# EAGLE board Panelize (EAGLE 8.5.2), part 1 of 2
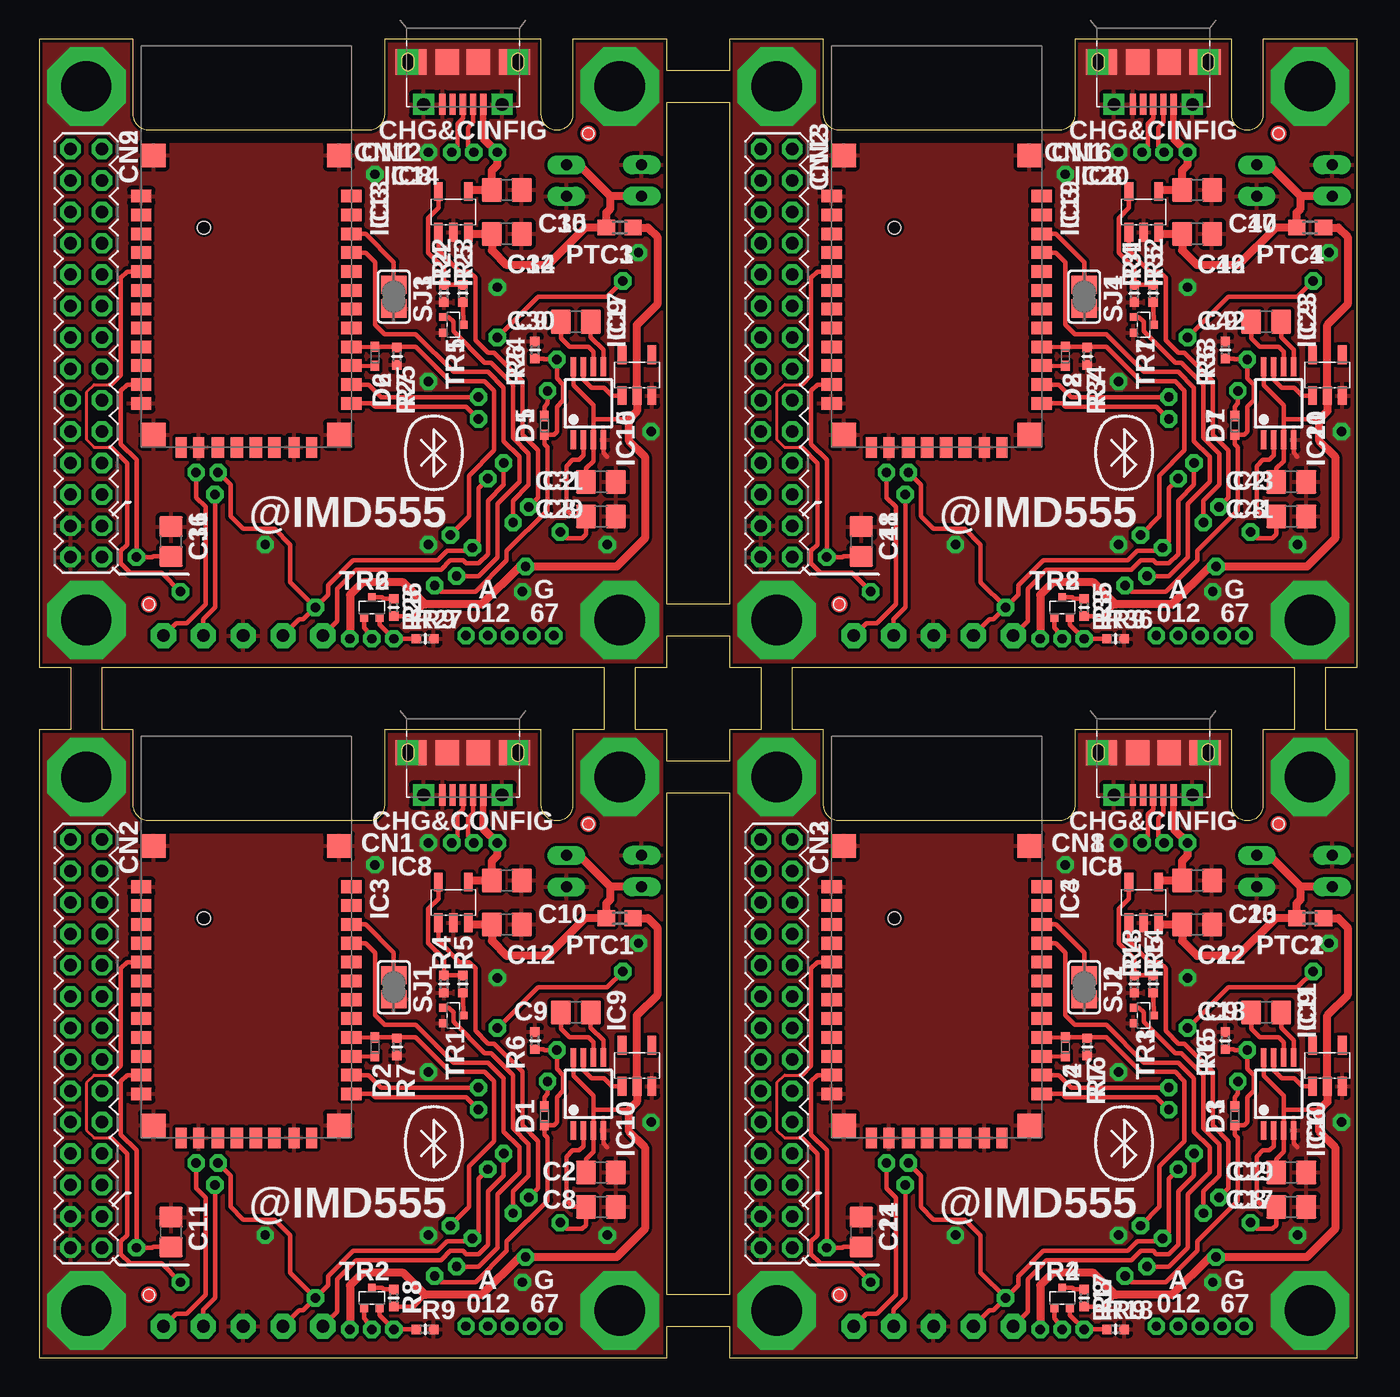
[diagram p0: board, top side]
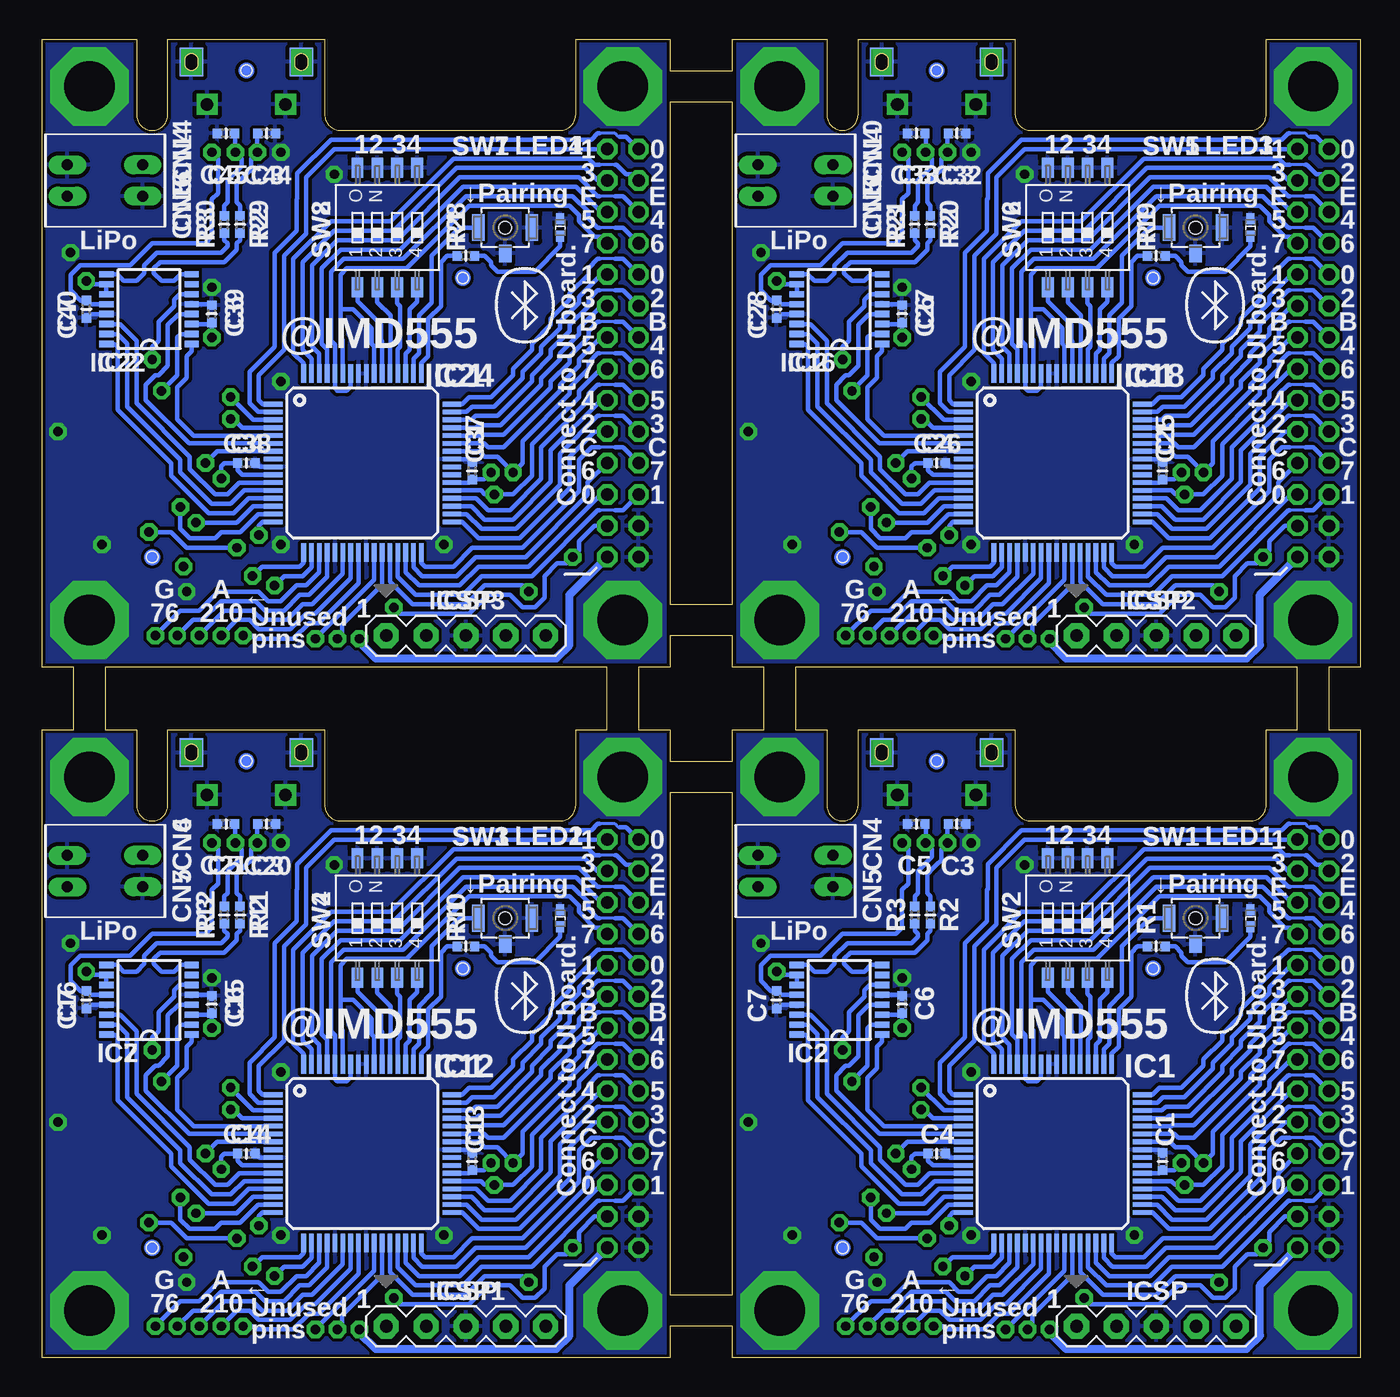
[diagram p1: board, bottom side, seen from below]

Size 84 x 84 mm. Coordinates in mm from the lower left corner, seen from the top.
Outline: 0,0 40,0 40,2 44,2 44,0 84,0 84,40 82,40 82,44 84,44 84,84 78,84 78,79.2 arc-90 77,78.2 arc-90 76,79.2 76,84 66,84 66,79.2 arc-90 65,78.2 51,78.2 arc-90 50,79.2 50,84 44,84 44,82 40,82 40,84 34,84 34,79.2 arc-90 33,78.2 arc-90 32,79.2 32,84 22,84 22,79.2 arc-90 21,78.2 7,78.2 arc-90 6,79.2 6,84 0,84 0,44 2,44 2,40 0,40 0,0
Outline: 40,4 40,36 44,36 44,4 40,4
Outline: 40,38 40,40 38,40 38,44 40,44 40,46 44,46 44,44 46,44 46,40 44,40 44,38 40,38
Outline: 36,40 34,40 34,35.2 arc-90 33,34.2 arc-90 32,35.2 32,40 22,40 22,35.2 arc-90 21,34.2 7,34.2 arc-90 6,35.2 6,40 4,40 4,44 36,44 36,40
Outline: 80,40 78,40 78,35.2 arc-90 77,34.2 arc-90 76,35.2 76,40 66,40 66,35.2 arc-90 65,34.2 51,34.2 arc-90 50,35.2 50,40 48,40 48,44 80,44 80,40
Outline: 40,48 40,80 44,80 44,48 40,48
Copper layers (1*16): Top 0.035mm / dielectric 1.5mm / Bottom 0.035mm
Design rules "SeeedStudio_2layer_DRU_no_angle_20140221_IMD555": minimum track width 0.2mm, minimum drill 0.5mm, track to track 0.2mm, track to pad 0.2mm, pad to pad 0.2mm, via to via 0.2mm, smd to smd 0mil, copper to edge 0.2mm, drill to drill 10mil, minimum pad ring 0.25mm, minimum via ring 0.25mm, stop-mask expansion 0.03mm, vias tented up to drill 5mm, thermal gap 10mil
Net classes: 1 Vbat: clearance 0.4 mm
tRestrict: area 0,39.8 to 84,44.2; area 39.8,0 to 44.2,84
bRestrict: area 0,39.8 to 84,44.2; area 39.8,0 to 44.2,84

## Footprints (pad centres in the part's own frame; a part is rotated, then mirrored left to right if it is on the bottom)
C0402-SS = smd 0.6 x 0.6: 1 -0.55,0; 2 0.55,0
C0805 = smd 1.3 x 1.5: 1 -0.95,0; 2 0.95,0
10118194-0001LF = smd 0.4 x 1.35: P$1 -1.3,4.15; P$2 -0.65,4.15; P$3 0,4.15; P$4 0.65,4.15; P$5 1.3,4.15 | smd 1.5 x 1.8 bottom: P$6 -3.5,1.45; P$7 3.5,1.45 | drill 0.8 pad 1.35 square: S1 -2.5,4.15; S2 2.5,4.15 | drill 0.8 pad 1.3 square: S3 -3.5,1.6; S4 -3.5,1.3; S9 3.5,1.6; S10 3.5,1.3 | smd 2 x 1.6: S5 -3.3,1.45; S8 3.3,1.45 | smd 1.5 x 1.6: S6 -1,1.45; S7 1,1.45
2MM_14X2 = drill 0.8 pad 1.3 octagon: 1 -13,-1; 2 -13,1; 3 -11,-1; 4 -11,1; 5 -9,-1; 6 -9,1; 7 -7,-1; 8 -7,1; 9 -5,-1; 10 -5,1; 11 -3,-1; 12 -3,1; 13 -1,-1; 14 -1,1; 15 1,-1; 16 1,1; 17 3,-1; 18 3,1; 19 5,-1; 20 5,1; 21 7,-1; 22 7,1; 23 9,-1; 24 9,1; 25 11,-1; 26 11,1; 27 13,-1; 28 13,1
PH-2_S = drill 0.7 long: 1 1,0; 2 -1,0
VMN2 = smd 0.65 x 0.55: A 0.6,0; C -0.6,0
TQFP64-10X10 = smd 1.2 x 0.3: 1 -5.7,3.75; 2 -5.7,3.25; 3 -5.7,2.75; 4 -5.7,2.25; 5 -5.7,1.75; 6 -5.7,1.25; 7 -5.7,0.75; 8 -5.7,0.25; 9 -5.7,-0.25; 10 -5.7,-0.75; 11 -5.7,-1.25; 12 -5.7,-1.75; 13 -5.7,-2.25; 14 -5.7,-2.75; 15 -5.7,-3.25; 16 -5.7,-3.75; 33 5.7,-3.75; 34 5.7,-3.25; 35 5.7,-2.75; 36 5.7,-2.25; 37 5.7,-1.75; 38 5.7,-1.25; 39 5.7,-0.75; 40 5.7,-0.25; 41 5.7,0.25; 42 5.7,0.75; 43 5.7,1.25; 44 5.7,1.75; 45 5.7,2.25; 46 5.7,2.75; 47 5.7,3.25; 48 5.7,3.75 | smd 0.3 x 1.2: 17 -3.75,-5.7; 18 -3.25,-5.7; 19 -2.75,-5.7; 20 -2.25,-5.7; 21 -1.75,-5.7; 22 -1.25,-5.7; 23 -0.75,-5.7; 24 -0.25,-5.7; 25 0.25,-5.7; 26 0.75,-5.7; 27 1.25,-5.7; 28 1.75,-5.7; 29 2.25,-5.7; 30 2.75,-5.7; 31 3.25,-5.7; 32 3.75,-5.7; 49 3.75,5.7; 50 3.25,5.7; 51 2.75,5.7; 52 2.25,5.7; 53 1.75,5.7; 54 1.25,5.7; 55 0.75,5.7; 56 0.25,5.7; 57 -0.25,5.7; 58 -0.75,5.7; 59 -1.25,5.7; 60 -1.75,5.7; 61 -2.25,5.7; 62 -2.75,5.7; 63 -3.25,5.7; 64 -3.75,5.7
SSOP16 = smd 0.914 x 0.406: 1 -2.718,2.223; 2 -2.718,1.587; 3 -2.718,0.953; 4 -2.718,0.318; 5 -2.718,-0.318; 6 -2.718,-0.953; 7 -2.718,-1.587; 8 -2.718,-2.223; 9 2.718,-2.223; 10 2.718,-1.587; 11 2.718,-0.953; 12 2.718,-0.318; 13 2.718,0.318; 14 2.718,0.953; 15 2.718,1.587; 16 2.718,2.223
RN-42 = smd 1.3 x 0.8: 1 -6.7,16; 2 -6.7,14.8; 3 -6.7,13.6; 4 -6.7,12.4; 5 -6.7,11.2; 6 -6.7,10; 7 -6.7,8.8; 8 -6.7,7.6; 9 -6.7,6.4; 10 -6.7,5.2; 11 -6.7,4; 12 -6.7,2.8; 13 6.7,2.8; 14 6.7,4; 15 6.7,5.2; 16 6.7,6.4; 17 6.7,7.6; 18 6.7,8.8; 19 6.7,10; 20 6.7,11.2; 21 6.7,12.4; 22 6.7,13.6; 23 6.7,14.8; 24 6.7,16 | smd 0.7 x 1.3: 28 3.05,0; 29 -3.05,0; 30 4.15,0; 35 -4.15,0 | smd 0.8 x 1.3: 31 1.8,0; 32 0.6,0; 33 -0.6,0; 34 -1.8,0 | smd 1.5 x 1.5: SHIELD -5.9,18.6; SHIELD@1 -5.9,0.8; SHIELD@2 5.9,0.8; SHIELD@3 5.9,18.6
SOT23-5L = smd 0.55 x 1.2: 1 -0.95,-1.3; 2 0,-1.3; 3 0.95,-1.3; 4 0.95,1.3; 5 -0.95,1.3
MSOP8 = smd 0.35 x 1.2: 1 -0.953,-2.325; 2 -0.318,-2.325; 3 0.318,-2.325; 4 0.953,-2.325; 5 0.953,2.325; 6 0.318,2.325; 7 -0.318,2.325; 8 -0.953,2.325
MA05-1 = drill 0.8 pad 1.6 octagon: 1 -5.08,0; 2 -2.54,0; 3 0,0; 4 2.54,0; 5 5.08,0
CHIP-LED1005 = smd 0.5 x 0.7: A 0,-0.55; C 0,0.55
R0603 = smd 1.1 x 1: 1 -0.85,0; 2 0.85,0
R0402-SS = smd 0.6 x 0.6: 1 -0.55,0; 2 0.55,0
SJ = smd 1.168 x 1.6: 1 -0.762,0; 2 0.762,0
B3U-1000P = smd 0.8 x 1.7: P$1 -1.7,0; P$2 1.7,0 | smd 0.8 x 1.1: P$3 0,-1.65 | hole 0.8: 0,0
CHS-04B = smd 0.76 x 1.27: 1 0,-3.81; 2 1.27,-3.81; 3 2.54,-3.81; 4 3.81,-3.81; 5 3.81,3.81; 6 2.54,3.81; 7 1.27,3.81; 8 0,3.81
SOT523 = smd 0.5 x 0.5: 1 -0.5,-0.65; 2 0.5,-0.65; 3 0,0.65

## Placement (x,y rotation side)
C1  0.1u  [C0402-SS]  12.6,12.5 270 bottom
C2  4.7u  [C0805]  35.8,11.8 0 top
C3  47p  [C0402-SS]  28.3,34 180 bottom
C4  0.1u  [C0402-SS]  27,13 180 bottom
C5  47p  [C0402-SS]  25.7,34 0 bottom
C6  0.1u  [C0402-SS]  29.2,22.5 90 bottom
C7  0.1u  [C0402-SS]  37.2,22.8 270 bottom
C8  4.7u  [C0805]  35.8,9.6 0 top
C9  1u  [C0805]  34.2,22 0 top
C10  4.7u  [C0805]  29.8,30.4 0 top
C11  4.7u  [C0805]  8.4,8 90 top
C12  4.7u  [C0805]  29.8,27.6 0 top
C13  0.1u  [C0402-SS]  56.6,12.5 270 bottom
C14  0.1u  [C0402-SS]  71,13 180 bottom
C15  0.1u  [C0402-SS]  73.2,22.5 90 bottom
C16  0.1u  [C0402-SS]  81.2,22.8 270 bottom
C17  4.7u  [C0805]  79.8,9.6 0 top
C18  1u  [C0805]  78.2,22 0 top
C19  4.7u  [C0805]  79.8,11.8 0 top
C20  47p  [C0402-SS]  72.3,34 180 bottom
C21  47p  [C0402-SS]  69.7,34 0 bottom
C22  4.7u  [C0805]  73.8,27.6 0 top
C23  4.7u  [C0805]  73.8,30.4 0 top
C24  4.7u  [C0805]  52.4,8 90 top
C25  0.1u  [C0402-SS]  12.6,56.5 270 bottom
C26  0.1u  [C0402-SS]  27,57 180 bottom
C27  0.1u  [C0402-SS]  29.2,66.5 90 bottom
C28  0.1u  [C0402-SS]  37.2,66.8 270 bottom
C29  4.7u  [C0805]  35.8,53.6 0 top
C30  1u  [C0805]  34.2,66 0 top
C31  4.7u  [C0805]  35.8,55.8 0 top
C32  47p  [C0402-SS]  28.3,78 180 bottom
C33  47p  [C0402-SS]  25.7,78 0 bottom
C34  4.7u  [C0805]  29.8,71.6 0 top
C35  4.7u  [C0805]  29.8,74.4 0 top
C36  4.7u  [C0805]  8.4,52 90 top
C37  0.1u  [C0402-SS]  56.6,56.5 270 bottom
C38  0.1u  [C0402-SS]  71,57 180 bottom
C39  0.1u  [C0402-SS]  73.2,66.5 90 bottom
C40  0.1u  [C0402-SS]  81.2,66.8 270 bottom
C41  4.7u  [C0805]  79.8,53.6 0 top
C42  1u  [C0805]  78.2,66 0 top
C43  4.7u  [C0805]  79.8,55.8 0 top
C44  47p  [C0402-SS]  72.3,78 180 bottom
C45  47p  [C0402-SS]  69.7,78 0 bottom
C46  4.7u  [C0805]  73.8,71.6 0 top
C47  4.7u  [C0805]  73.8,74.4 0 top
C48  4.7u  [C0805]  52.4,52 90 top
CN1  ZX62M-B-5P10118194-0001LF  [10118194-0001LF]  27,40 180 top
CN2  2X14  [2MM_14X2]  3,20 90 top
CN3  2X14  [2MM_14X2]  47,20 90 top
CN4  [PH-2_S]  33.6,31 90 bottom
CN5  [PH-2_S]  38.4,31 270 bottom
CN6  [PH-2_S]  77.6,31 90 bottom
CN7  [PH-2_S]  82.4,31 270 bottom
CN8  ZX62M-B-5P10118194-0001LF  [10118194-0001LF]  71,40 180 top
CN9  2X14  [2MM_14X2]  3,64 90 top
CN10  [PH-2_S]  33.6,75 90 bottom
CN11  [PH-2_S]  38.4,75 270 bottom
CN12  ZX62M-B-5P10118194-0001LF  [10118194-0001LF]  27,84 180 top
CN13  2X14  [2MM_14X2]  47,64 90 top
CN14  [PH-2_S]  77.6,75 90 bottom
CN15  [PH-2_S]  82.4,75 270 bottom
CN16  ZX62M-B-5P10118194-0001LF  [10118194-0001LF]  71,84 180 top
D1  [VMN2]  32.2,15.4 90 top
D2  [VMN2]  21.4,19.8 270 top
D3  [VMN2]  76.2,15.4 90 top
D4  [VMN2]  65.4,19.8 270 top
D5  [VMN2]  32.2,59.4 90 top
D6  [VMN2]  21.4,63.8 270 top
D7  [VMN2]  76.2,59.4 90 top
D8  [VMN2]  65.4,63.8 270 top
IC1  PIC18F67K40  [TQFP64-10X10]  19.6,13 0 bottom
IC2  FT230X  [SSOP16]  33.2,22.8 180 bottom
IC3  RN42  [RN-42]  13.2,14 0 top
IC4  RN42  [RN-42]  57.2,14 0 top
IC5  MCP73831  [SOT23-5L]  70.4,29 0 top
IC6  MCP1253-33X50  [MSOP8]  79,16.8 0 top
IC7  FT230X  [SSOP16]  77.2,22.8 180 bottom
IC8  MCP73831  [SOT23-5L]  26.4,29 0 top
IC9  BD4931G  [SOT23-5L]  38.1,18.6 0 top
IC10  MCP1253-33X50  [MSOP8]  35,16.8 0 top
IC11  BD4931G  [SOT23-5L]  82.1,18.6 0 top
IC12  PIC18F67K40  [TQFP64-10X10]  63.6,13 0 bottom
IC13  RN42  [RN-42]  13.2,58 0 top
IC14  MCP73831  [SOT23-5L]  26.4,73 0 top
IC15  MCP1253-33X50  [MSOP8]  35,60.8 0 top
IC16  FT230X  [SSOP16]  33.2,66.8 180 bottom
IC17  BD4931G  [SOT23-5L]  38.1,62.6 0 top
IC18  PIC18F67K40  [TQFP64-10X10]  19.6,57 0 bottom
IC19  RN42  [RN-42]  57.2,58 0 top
IC20  MCP73831  [SOT23-5L]  70.4,73 0 top
IC21  MCP1253-33X50  [MSOP8]  79,60.8 0 top
IC22  FT230X  [SSOP16]  77.2,66.8 180 bottom
IC23  BD4931G  [SOT23-5L]  82.1,62.6 0 top
IC24  PIC18F67K40  [TQFP64-10X10]  63.6,57 0 bottom
ICSP  [MA05-1]  13,2 0 bottom
ICSP1  [MA05-1]  57,2 0 bottom
ICSP2  [MA05-1]  13,46 0 bottom
ICSP3  [MA05-1]  57,46 0 bottom
LED1  White  [CHIP-LED1005]  7,28 0 bottom
LED2  White  [CHIP-LED1005]  51,28 0 bottom
LED3  White  [CHIP-LED1005]  7,72 0 bottom
LED4  White  [CHIP-LED1005]  51,72 0 bottom
PTC1  250mA 100mA 0ZCM0010FF2G  [R0603]  37,28 0 top
PTC2  250mA 100mA 0ZCM0010FF2G  [R0603]  81,28 0 top
PTC3  250mA 100mA 0ZCM0010FF2G  [R0603]  37,72 0 top
PTC4  250mA 100mA 0ZCM0010FF2G  [R0603]  81,72 0 top
R1  100  [R0402-SS]  13,26.2 0 bottom
R2  27  [R0402-SS]  27.4,28.2 90 bottom
R3  27  [R0402-SS]  28.4,28.2 90 bottom
R4  10k  [R0402-SS]  25.8,23.8 90 top
R5  3.3k  [R0402-SS]  27,23.8 90 top
R6  10k  [R0402-SS]  31.6,20.2 270 top
R7  10k  [R0402-SS]  22.8,19.8 270 top
R8  33k  [R0402-SS]  22.6,3.8 270 top
R9  10k  [R0402-SS]  24.6,1.8 180 top
R10  100  [R0402-SS]  57,26.2 0 bottom
R11  27  [R0402-SS]  71.4,28.2 90 bottom
R12  27  [R0402-SS]  72.4,28.2 90 bottom
R13  10k  [R0402-SS]  69.8,23.8 90 top
R14  3.3k  [R0402-SS]  71,23.8 90 top
R15  10k  [R0402-SS]  75.6,20.2 270 top
R16  10k  [R0402-SS]  66.8,19.8 270 top
R17  33k  [R0402-SS]  66.6,3.8 270 top
R18  10k  [R0402-SS]  68.6,1.8 180 top
R19  100  [R0402-SS]  13,70.2 0 bottom
R20  27  [R0402-SS]  27.4,72.2 90 bottom
R21  27  [R0402-SS]  28.4,72.2 90 bottom
R22  10k  [R0402-SS]  25.8,67.8 90 top
R23  3.3k  [R0402-SS]  27,67.8 90 top
R24  10k  [R0402-SS]  31.6,64.2 270 top
R25  10k  [R0402-SS]  22.8,63.8 270 top
R26  33k  [R0402-SS]  22.6,47.8 270 top
R27  10k  [R0402-SS]  24.6,45.8 180 top
R28  100  [R0402-SS]  57,70.2 0 bottom
R29  27  [R0402-SS]  71.4,72.2 90 bottom
R30  27  [R0402-SS]  72.4,72.2 90 bottom
R31  10k  [R0402-SS]  69.8,67.8 90 top
R32  3.3k  [R0402-SS]  71,67.8 90 top
R33  10k  [R0402-SS]  75.6,64.2 270 top
R34  10k  [R0402-SS]  66.8,63.8 270 top
R35  33k  [R0402-SS]  66.6,47.8 270 top
R36  10k  [R0402-SS]  68.6,45.8 180 top
SJ1  [SJ]  22.6,23.6 270 top
SJ2  [SJ]  66.6,23.6 270 top
SJ3  [SJ]  22.6,67.6 270 top
SJ4  [SJ]  66.6,67.6 270 top
SW1  B3U-1000P  [B3U-1000P]  10.5,28 0 bottom
SW2  CHS-04B  [CHS-04B]  19.92,28 0 bottom
SW3  B3U-1000P  [B3U-1000P]  54.5,28 0 bottom
SW4  CHS-04B  [CHS-04B]  63.92,28 0 bottom
SW5  B3U-1000P  [B3U-1000P]  10.5,72 0 bottom
SW6  CHS-04B  [CHS-04B]  19.92,72 0 bottom
SW7  B3U-1000P  [B3U-1000P]  54.5,72 0 bottom
SW8  CHS-04B  [CHS-04B]  63.92,72 0 bottom
TR1  DMG1012T-7  [SOT523]  26.4,21.8 270 top
TR2  DMG1012T  [SOT523]  21.2,3.8 0 top
TR3  DMG1012T-7  [SOT523]  70.4,21.8 270 top
TR4  DMG1012T  [SOT523]  65.2,3.8 0 top
TR5  DMG1012T-7  [SOT523]  26.4,65.8 270 top
TR6  DMG1012T  [SOT523]  21.2,47.8 0 top
TR7  DMG1012T-7  [SOT523]  70.4,65.8 270 top
TR8  DMG1012T  [SOT523]  65.2,47.8 0 top
U$1  [PCB_CHECK]  7,4 0 top
U$2  [PCB_CHECK]  51,4 0 top
U$3  [PCB_CHECK]  35,34 0 top
U$4  [PCB_CHECK]  79,34 0 top
U$5  [PCB_CHECK]  77,7 0 bottom
U$6  [PCB_CHECK]  33,7 0 bottom
U$7  [PCB_CHECK]  57.2,24.8 0 bottom
U$8  [PCB_CHECK]  13.2,24.8 0 bottom
U$9  [PCB_CHECK]  27,38 0 bottom
U$10  [PCB_CHECK]  71,38 0 bottom
U$11  [PCB_CHECK]  7,48 0 top
U$12  [PCB_CHECK]  35,78 0 top
U$13  [PCB_CHECK]  33,51 0 bottom
U$14  [PCB_CHECK]  13.2,68.8 0 bottom
U$15  [PCB_CHECK]  27,82 0 bottom
U$16  [PCB_CHECK]  51,48 0 top
U$17  [PCB_CHECK]  79,78 0 top
U$18  [PCB_CHECK]  77,51 0 bottom
U$19  [PCB_CHECK]  57.2,68.8 0 bottom
U$20  [PCB_CHECK]  71,82 0 bottom

## Library data of the parts
C1-C48 PTC1-PTC4 R1-R36 = 2 RCL
CN1 CN8 CN12 CN16 IC1 IC3-IC6 IC8-IC15 IC17-IC21 IC23 IC24 LED1-LED4 SW1 SW3 SW5 SW7 TR1-TR8 U$1-U$20 = 0 my parts
CN2 CN3 CN9 CN13 ICSP ICSP1-ICSP3 = 4 _l__l_
CN4-CN7 CN10 CN11 CN14 CN15 = 4 CONNECTOR
D1-D8 = 5 D
IC2 IC7 IC16 IC22 = ftdichip
SJ1-SJ4 = 3 JUMPER
SW2 SW4 SW6 SW8 = 3 switch-copal

## Nets
GND: C1.1 C2.2 C3.2 C4.1 C5.2 C6.2 C7.2 C8.2 C10.2 C11.2 C12.2 CN1.P$5 CN1.P$6 CN1.P$7 CN1.S1 CN1.S2 CN1.S3 CN1.S4 CN1.S5 CN1.S6 CN1.S7 CN1.S8 CN1.S9 CN1.S10 CN2.2 CN2.4 CN4.2 CN5.2 IC1.9 IC1.21 IC1.25 IC1.41 IC1.56 IC1.57 IC2.5 IC2.13 IC3.1 IC3.12 IC3.28 IC3.29 IC3.SHIELD IC3.SHIELD@1 IC3.SHIELD@2 IC3.SHIELD@3 IC8.2 IC9.3 IC10.4 ICSP.3 LED1.C R4.1 R6.1 R7.2 R9.1 SJ1.2 SW1.P$2 SW1.P$3 SW2.5 SW2.6 SW2.7 SW2.8 TR1.2
GND1: C13.1 C14.1 C15.2 C16.2 C17.2 C19.2 C20.2 C21.2 C22.2 C23.2 C24.2 CN3.2 CN3.4 CN6.2 CN7.2 CN8.P$5 CN8.P$6 CN8.P$7 CN8.S1 CN8.S2 CN8.S3 CN8.S4 CN8.S5 CN8.S6 CN8.S7 CN8.S8 CN8.S9 CN8.S10 IC4.1 IC4.12 IC4.28 IC4.29 IC4.SHIELD IC4.SHIELD@1 IC4.SHIELD@2 IC4.SHIELD@3 IC5.2 IC6.4 IC7.5 IC7.13 IC11.3 IC12.9 IC12.21 IC12.25 IC12.41 IC12.56 IC12.57 ICSP1.3 LED2.C R13.1 R15.1 R16.2 R18.1 SJ2.2 SW3.P$2 SW3.P$3 SW4.5 SW4.6 SW4.7 SW4.8 TR3.2
GND2: C25.1 C26.1 C27.2 C28.2 C29.2 C31.2 C32.2 C33.2 C34.2 C35.2 C36.2 CN9.2 CN9.4 CN10.2 CN11.2 CN12.P$5 CN12.P$6 CN12.P$7 CN12.S1 CN12.S2 CN12.S3 CN12.S4 CN12.S5 CN12.S6 CN12.S7 CN12.S8 CN12.S9 CN12.S10 IC13.1 IC13.12 IC13.28 IC13.29 IC13.SHIELD IC13.SHIELD@1 IC13.SHIELD@2 IC13.SHIELD@3 IC14.2 IC15.4 IC16.5 IC16.13 IC17.3 IC18.9 IC18.21 IC18.25 IC18.41 IC18.56 IC18.57 ICSP2.3 LED3.C R22.1 R24.1 R25.2 R27.1 SJ3.2 SW5.P$2 SW5.P$3 SW6.5 SW6.6 SW6.7 SW6.8 TR5.2
GND3: C37.1 C38.1 C39.2 C40.2 C41.2 C43.2 C44.2 C45.2 C46.2 C47.2 C48.2 CN13.2 CN13.4 CN14.2 CN15.2 CN16.P$5 CN16.P$6 CN16.P$7 CN16.S1 CN16.S2 CN16.S3 CN16.S4 CN16.S5 CN16.S6 CN16.S7 CN16.S8 CN16.S9 CN16.S10 IC19.1 IC19.12 IC19.28 IC19.29 IC19.SHIELD IC19.SHIELD@1 IC19.SHIELD@2 IC19.SHIELD@3 IC20.2 IC21.4 IC22.5 IC22.13 IC23.3 IC24.9 IC24.21 IC24.25 IC24.41 IC24.56 IC24.57 ICSP3.3 LED4.C R31.1 R33.1 R34.2 R36.1 SJ4.2 SW7.P$2 SW7.P$3 SW8.5 SW8.6 SW8.7 SW8.8 TR7.2
N$1: IC1.4 IC3.13
N$2: IC1.5 IC2.1
N$3: IC1.3 IC3.14
N$4: C16.1 C23.1 CN8.P$1 IC5.4 IC7.12
N$5: C5.1 CN1.P$3 R2.2
N$6: C3.1 CN1.P$2 R3.2
N$7: IC1.6 IC2.4
N$8: IC12.7 ICSP1.1
N$9: C7.1 C10.1 CN1.P$1 IC2.12 IC8.4
N$10: IC1.15 IC8.1
N$11: IC4.14 IC12.3
N$12: IC4.13 IC12.4
N$13: IC7.4 IC12.6
N$14: IC1.7 ICSP.1
N$15: IC7.1 IC12.5
N$16: C18.1 IC6.6
N$17: C18.2 IC6.5
N$18: IC12.52 SW4.3
N$19: IC12.51 SW4.4
N$20: IC12.50 SW3.P$1
N$21: IC12.53 SW4.2
N$22: IC12.54 SW4.1
N$23: IC12.49 R10.1
N$24: LED2.A R10.2
N$25: IC4.5 IC12.28
N$26: IC7.9 R12.1
N$27: IC7.8 R11.1
N$28: C21.1 CN8.P$3 R11.2
N$29: C20.1 CN8.P$2 R12.2
N$30: IC7.15 IC12.12
N$31: IC7.16 IC12.13
N$32: IC5.5 R13.2 R14.2
N$33: IC12.14 TR3.1
N$34: IC1.54 SW2.1
N$35: IC1.52 SW2.3
N$36: C9.1 IC10.6
N$37: C9.2 IC10.5
N$38: IC1.51 SW2.4
N$39: IC1.49 R1.1
N$40: IC1.28 IC3.5
N$41: LED1.A R1.2
N$42: C6.1 IC2.3 IC2.10 IC2.11
N$43: IC1.50 SW1.P$1
N$44: IC2.9 R3.1
N$45: IC1.53 SW2.2
N$46: IC2.8 R2.1
N$47: C15.1 IC7.3 IC7.10 IC7.11
N$48: IC1.12 IC2.15
N$49: IC1.13 IC2.16
N$50: IC8.5 R4.2 R5.2
N$51: IC1.27 TR2.1
N$52: D2.C IC1.16 IC3.16 R7.1
N$53: IC1.14 TR1.1
N$54: D2.A IC3.15
N$55: IC1.11 IC2.14
N$56: D1.A IC2.2
N$57: D1.C IC1.18 IC2.6 R6.2
N$58: IC1.17 IC3.21
N$59: IC3.22 SJ1.1
N$60: D4.A IC4.15
N$61: IC7.14 IC12.11
N$62: D3.A IC7.2
N$63: D4.C IC4.16 IC12.16 R16.1
N$64: D3.C IC7.6 IC12.18 R15.2
N$65: IC4.22 SJ2.1
N$66: IC4.21 IC12.17
N$67: IC5.1 IC12.15
N$68: IC12.27 TR4.1
N$69: IC6.7 IC11.1
N$70: IC9.1 IC10.7
N$71: R5.1 TR1.3
N$72: IC1.20
N$73: R8.1 TR2.3
N$74: IC1.26 R9.2 TR2.2
N$75: IC1.22
N$76: R14.1 TR3.3
N$77: R17.1 TR4.3
N$78: IC12.26 R18.2 TR4.2
N$79: IC12.22
N$80: IC12.24
N$81: IC12.20
N$82: IC12.19
N$83: IC12.23
N$84: C28.1 C35.1 CN12.P$1 IC14.4 IC16.12
N$85: IC18.7 ICSP2.1
N$86: IC13.14 IC18.3
N$87: IC13.13 IC18.4
N$88: IC16.4 IC18.6
N$89: IC16.1 IC18.5
N$90: C30.1 IC15.6
N$91: C30.2 IC15.5
N$92: IC18.52 SW6.3
N$93: IC1.24
N$94: IC18.51 SW6.4
N$95: IC1.19
N$96: IC1.23
N$97: IC18.50 SW5.P$1
N$98: IC18.53 SW6.2
N$99: IC18.54 SW6.1
N$100: IC18.49 R19.1
N$101: LED3.A R19.2
N$102: IC13.5 IC18.28
N$103: IC16.9 R21.1
N$104: IC16.8 R20.1
N$105: C33.1 CN12.P$3 R20.2
N$106: C32.1 CN12.P$2 R21.2
N$107: IC16.15 IC18.12
N$108: IC16.16 IC18.13
N$109: IC14.5 R22.2 R23.2
N$110: IC18.14 TR5.1
N$111: C27.1 IC16.3 IC16.10 IC16.11
N$112: D6.A IC13.15
N$113: IC16.14 IC18.11
N$114: D5.A IC16.2
N$115: D6.C IC13.16 IC18.16 R25.1
N$116: D5.C IC16.6 IC18.18 R24.2
N$117: IC13.22 SJ3.1
N$118: IC13.21 IC18.17
N$119: IC14.1 IC18.15
N$120: IC18.27 TR6.1
N$121: IC15.7 IC17.1
N$122: R23.1 TR5.3
N$123: R26.1 TR6.3
N$124: IC18.26 R27.2 TR6.2
N$125: IC18.22
N$126: IC18.24
N$127: IC18.20
N$128: IC18.19
N$129: IC18.23
N$130: C40.1 C47.1 CN16.P$1 IC20.4 IC22.12
N$131: IC24.7 ICSP3.1
N$132: IC19.14 IC24.3
N$133: IC19.13 IC24.4
N$134: IC22.4 IC24.6
N$135: IC22.1 IC24.5
N$136: C42.1 IC21.6
N$137: C42.2 IC21.5
N$138: IC24.52 SW8.3
N$139: IC24.51 SW8.4
N$140: IC24.50 SW7.P$1
N$141: IC24.53 SW8.2
N$142: IC24.54 SW8.1
N$143: IC24.49 R28.1
N$144: LED4.A R28.2
N$145: IC19.5 IC24.28
N$146: IC22.9 R30.1
N$147: IC22.8 R29.1
N$148: C45.1 CN16.P$3 R29.2
N$149: C44.1 CN16.P$2 R30.2
N$150: IC22.15 IC24.12
N$151: IC22.16 IC24.13
N$152: IC20.5 R31.2 R32.2
N$153: IC24.14 TR7.1
N$154: C39.1 IC22.3 IC22.10 IC22.11
N$155: D8.A IC19.15
N$156: IC22.14 IC24.11
N$157: D7.A IC22.2
N$158: D8.C IC19.16 IC24.16 R34.1
N$159: D7.C IC22.6 IC24.18 R33.2
N$160: IC19.22 SJ4.1
N$161: IC19.21 IC24.17
N$162: IC20.1 IC24.15
N$163: IC24.27 TR8.1
N$164: IC21.7 IC23.1
N$165: R32.1 TR7.3
N$166: R35.1 TR8.3
N$167: IC24.26 R36.2 TR8.2
N$168: IC24.22
N$169: IC24.24
N$170: IC24.20
N$171: IC24.19
N$172: IC24.23
RB0: CN2.20 IC1.48
RB1: CN2.19 IC1.47
RB2: CN2.18 IC1.46
RB3: CN2.17 IC1.45
RB4: CN2.16 IC1.44
RB5: CN2.15 IC1.43
RB6: CN2.14 IC1.42 ICSP.5
RB7: CN2.13 IC1.37 ICSP.4
RB8: CN3.20 IC12.48
RB9: CN3.19 IC12.47
RB10: CN3.18 IC12.46
RB11: CN3.17 IC12.45
RB12: CN3.16 IC12.44
RB13: CN3.15 IC12.43
RB14: CN3.14 IC12.42 ICSP1.5
RB15: CN3.13 IC12.37 ICSP1.4
RB16: CN9.20 IC18.48
RB17: CN9.19 IC18.47
RB18: CN9.18 IC18.46
RB19: CN9.17 IC18.45
RB20: CN9.16 IC18.44
RB21: CN9.15 IC18.43
RB22: CN9.14 IC18.42 ICSP2.5
RB23: CN9.13 IC18.37 ICSP2.4
RB24: CN13.20 IC24.48
RB25: CN13.19 IC24.47
RB26: CN13.18 IC24.46
RB27: CN13.17 IC24.45
RB28: CN13.16 IC24.44
RB29: CN13.15 IC24.43
RB30: CN13.14 IC24.42 ICSP3.5
RB31: CN13.13 IC24.37 ICSP3.4
RC0: CN2.5 IC1.30
RC1: CN2.6 IC1.29
RC2: CN2.9 IC1.33
RC3: CN2.10 IC1.34
RC4: CN2.11 IC1.35
RC5: CN2.12 IC1.36
RC6: CN2.7 IC1.31
RC7: CN2.8 IC1.32
RC8: CN3.12 IC12.36
RC9: CN3.11 IC12.35
RC10: CN3.10 IC12.34
RC11: CN3.9 IC12.33
RC12: CN3.8 IC12.32
RC13: CN3.7 IC12.31
RC14: CN3.5 IC12.30
RC15: CN3.6 IC12.29
RC16: CN9.12 IC18.36
RC17: CN9.11 IC18.35
RC18: CN9.10 IC18.34
RC19: CN9.9 IC18.33
RC20: CN9.8 IC18.32
RC21: CN9.7 IC18.31
RC22: CN9.5 IC18.30
RC23: CN9.6 IC18.29
RC24: CN13.12 IC24.36
RC25: CN13.11 IC24.35
RC26: CN13.10 IC24.34
RC27: CN13.9 IC24.33
RC28: CN13.8 IC24.32
RC29: CN13.7 IC24.31
RC30: CN13.5 IC24.30
RC31: CN13.6 IC24.29
RE0: CN2.28 IC1.2
RE1: CN2.27 IC1.1
RE2: CN2.26 IC1.64
RE3: CN2.25 IC1.63
RE4: CN2.24 IC1.62
RE5: CN2.23 IC1.61
RE6: CN2.22 IC1.58 IC1.60
RE7: CN2.21 IC1.55 IC1.59
RE8: CN3.21 IC12.55 IC12.59
RE9: CN3.22 IC12.58 IC12.60
RE10: CN3.23 IC12.61
RE11: CN3.24 IC12.62
RE12: CN3.25 IC12.63
RE13: CN3.26 IC12.64
RE14: CN3.27 IC12.1
RE15: CN3.28 IC12.2
RE16: CN9.21 IC18.55 IC18.59
RE17: CN9.22 IC18.58 IC18.60
RE18: CN9.23 IC18.61
RE19: CN9.24 IC18.62
RE20: CN9.25 IC18.63
RE21: CN9.26 IC18.64
RE22: CN9.27 IC18.1
RE23: CN9.28 IC18.2
RE24: CN13.21 IC24.55 IC24.59
RE25: CN13.22 IC24.58 IC24.60
RE26: CN13.23 IC24.61
RE27: CN13.24 IC24.62
RE28: CN13.25 IC24.63
RE29: CN13.26 IC24.64
RE30: CN13.27 IC24.1
RE31: CN13.28 IC24.2
VBAT [Vbat]: C12.1 CN4.1 CN5.1 IC8.3 PTC1.1
VBAT1 [Vbat]: C19.1 CN3.1 IC6.3 IC6.8 IC11.2 PTC2.2 R17.2
VBAT2 [Vbat]: C2.1 CN2.1 IC9.2 IC10.3 IC10.8 PTC1.2 R8.2
VBAT3 [Vbat]: C22.1 CN6.1 CN7.1 IC5.3 PTC2.1
VBAT4 [Vbat]: C31.1 CN9.1 IC15.3 IC15.8 IC17.2 PTC3.2 R26.2
VBAT5 [Vbat]: C34.1 CN10.1 CN11.1 IC14.3 PTC3.1
VBAT6 [Vbat]: C43.1 CN13.1 IC21.3 IC21.8 IC23.2 PTC4.2 R35.2
VBAT7 [Vbat]: C46.1 CN14.1 CN15.1 IC20.3 PTC4.1
VDD: C1.2 C4.2 C8.1 C11.1 CN2.3 IC1.10 IC1.38 IC3.11 IC10.2 ICSP.2
VDD1: C13.2 C14.2 C17.1 C24.1 CN3.3 IC4.11 IC6.2 IC12.10 IC12.38 ICSP1.2
VDD2: C25.2 C26.2 C29.1 C36.1 CN9.3 IC13.11 IC15.2 IC18.10 IC18.38 ICSP2.2
VDD3: C37.2 C38.2 C41.1 C48.1 CN13.3 IC19.11 IC21.2 IC24.10 IC24.38 ICSP3.2